# Altium PCB USB U-Turn.PcbDoc
Units mil, origin at the board's own origin, x right, y up, seen from the top; angles counter-clockwise.
Board outline 590.55 x 472.44 mil, 2 copper layers (Component Side, Solder Side); 2 components, 15 nets, 62 pads, 30 vias.
Unrouted connection lines stored in the file: 5.
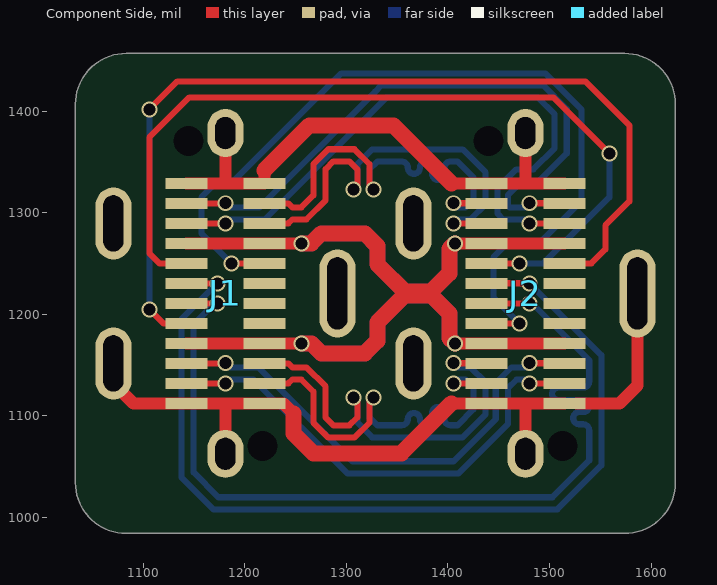
[diagram p0: Component Side view]
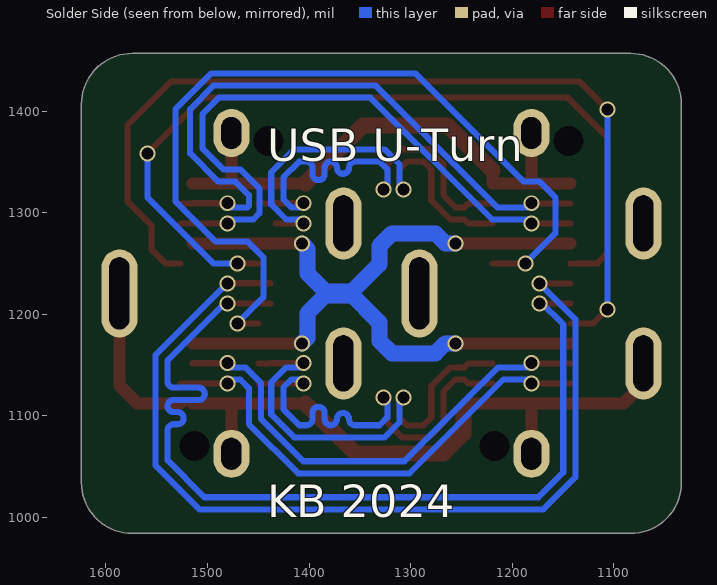
[diagram p1: Solder Side view, seen from below]

## Layer stack, top to bottom
Top Solder: solder mask 0.4, Solder Resist, Dk 3.5
Component Side: signal copper 1.4
Dielectric 1: core 12.6, FR-4, Dk 4.8
Solder Side: signal copper 1.4
Bottom Solder: solder mask 0.4, Solder Resist, Dk 3.5

## Board outline
1033.46,1034.25 1033.46,1406.69 cw(c1083.46,1406.69) 1083.46,1456.69 1574.02,1456.69 cw(c1574.02,1406.69) 1624.02,1406.69 1624.02,1034.25 cw(c1574.02,1034.25) 1574.02,984.25 1083.46,984.25 cw(c1083.46,1034.25)

## Design rules (kind name [scope] priority, off if disabled: settings)
BoardOutlineClearance [All] p1: gap=7.87 ignorepadtopadclearanceinfootprint=FALSE
Clearance [All] p1: gap=5 ignorepadtopadclearanceinfootprint=FALSE except(9.84: Arc-Hole Track-Hole SMDPad-Hole THPad-Hole Via-Hole Fill-Hole Poly-Hole Region-Hole Text-Hole)
ComponentClearance [All] p1: gap=5 collisioncheckmode=3 verticalgap=5 showdistances=TRUE
DiffPairsRouting [All] p1: maxlimit=10 minlimit=5 mostfreqgap=5 toplayer_minwidth=5 toplayer_maxwidth=1000 toplayer_prefwidth=5 bottomlayer_minwidth=5 bottomlayer_maxwidth=1000 bottomlayer_prefwidth=5 maxuncoupledlength=500
Height [All] p1: minheight=0 maxheight=71497.94 prefheight=500
HoleSize [All] p1: absolutevalues=TRUE maxlimit=248.03 minlimit=11.81 maxpercent=80.000 minpercent=20.000
HoleToHoleClearance [All] p1: gap=9.84 allowstackedmicrovias=FALSE
MinimumAnnularRing [All] p1: minimumring=3
MinimumSolderMaskSliver [All] p1: minsoldermaskwidth=0
PlaneClearance [All] p1: clearance=5
PlaneConnect PlaneConnectPowerPads [InPadClass('PowerPads')] p1: planeconnectstyle=Direct reliefexpansion=20 reliefentries=4 reliefconductorwidth=10 reliefairgap=10
PlaneConnect [All] p2: pad.planeconnectstyle=Relief pad.reliefexpansion=11.81 pad.reliefentries=4 pad.reliefconductorwidth=5 pad.reliefairgap=5 via.planeconnectstyle=Direct via.reliefexpansion=11.81 via.reliefentries=4 via.reliefconductorwidth=5 via.reliefairgap=5
PolygonConnect PolygonConnectPowerPads [All vs (InPadClass('PowerPads'))] p1: connectstyle=Direct reliefconductorwidth=10 reliefentries=4 polygonreliefangle="90 Angle" airgapwidth=10
PolygonConnect [All] p2: thpad.connectstyle=Relief thpad.reliefconductorwidth=5 thpad.reliefentries=4 thpad.polygonreliefangle="90 Angle" thpad.airgapwidth=5 smdpad.connectstyle=Relief smdpad.reliefconductorwidth=5 smdpad.reliefentries=4 smdpad.polygonreliefangle="90 Angle" smdpad.airgapwidth=5 via.connectstyle=Direct via.reliefconductorwidth=5 via.reliefentries=4 via.polygonreliefangle="90 Angle" via.airgapwidth=5
RoutingVias [All] p1: holewidth=11.81 width=23.62 viastyle="Through Hole" minholewidth=11.81 minwidth=15.75 maxholewidth=23.62 maxwidth=259.84
SilkToSilkClearance [All] p1: silktosilkclearance=0
SilkToSolderMaskClearance [IsPad] p1: minsilkscreentomaskgap=5 clearancetoexposedcopper=TRUE
SolderMaskExpansion [All] p1: expansion=2.95 istentingtop=FALSE
Width [All] p1: maxlimit=1000 minlimit=5 preferedwidth=5 minimp=50.000000 maximp=50.000000 favimp=50.000000
20 further rules are at their usual default settings.

## Classes and differential pairs
net class USBSS: D_N D_P RX1_N RX1_P RX2_N RX2_P TX1_N TX1_P TX2_N TX2_P
differential pair D: +D_P -D_N
differential pair TX2: +TX2_P -TX2_N
differential pair TX1: +TX1_P -TX1_N
differential pair RX2: +RX2_P -RX2_N
differential pair RX1: +RX1_P -RX1_N

## Components (designator, comment, footprint, x,y, rotation, side; value= is the part's Value field where it differs from the comment)
J1 "USB4151-GF-C" USB4151-GF-C 1181.1,1220.47 r90 top
J2 "USB4151-GF-C" USB4151-GF-C 1476.38,1220.47 r90 top

## Footprints (in the part's own frame and the unit in brackets; to place one, negate y for a bottom-side part, rotate by r counter-clockwise, add the part's x,y. Pads: shape width x height; smd on the part's side, far side on the other; paste and mask are expansions set on the pad)
USB4151-GF-C [mm] "USB TYPE C, PLUG, SMT , G/F, VER"
  rect 0.28x1.05 smd: A1(2.75,0.975) A2(2.25,0.975) A3(1.75,0.975) A4(1.25,0.975) A5(0.75,0.975) A6(0.25,0.975) A7(-0.25,0.975) A8(-0.75,0.975) A9(-1.25,0.975) A10(-1.75,0.975) A11(-2.25,0.975) A12(-2.75,0.975) B1(-2.75,-0.975) B2(-2.25,-0.975) B3(-1.75,-0.975) B4(-1.25,-0.975) B5(-0.75,-0.975) B6(-0.25,-0.975) B7(0.25,-0.975) B8(0.75,-0.975) B9(1.25,-0.975) B10(1.75,-0.975) B11(2.25,-0.975) B12(2.75,-0.975)
  round 0 hole 0.75 unplated: B13(-3.81,-0.925) B13(3.81,0.925)
  oval 1.2x0.9 hole 0.8 slot 0.5 at 90 deg: SHD(-4.01,0) SHD(4.01,0)
  oval 1.8x0.9 hole 1.4 slot 0.5 at 90 deg: SHD(-1.75,2.8) SHD(1.75,2.8)
  oval 2.2x0.9 hole 1.8 slot 0.5 at 90 deg: SHD(0,-2.8)
  body extent -4.33,-2.87 4.33,2.88, height 11.15

## Part data
J1 J2: "USB TYPE C, PLUG, SMT , G/F, VER"

## Via types
v1: diameter 15.75, hole 11.81, Component Side to Solder Side, 30 vias

## Nets (pads, with @x,y where several pads share a name; then routed paths per layer and width w, separated by ;. In a path a pad name is that pad's centre, name@x,y a point inside that pad or via, vN(x,y) a via of type N, cw(c..) or ccw(c..) an arc to the next point about the centre after c; other vN are vias at no path point)
D_N: J1.A7 J2.A7 | length 931.1
  Component Side w6: J1.A7 1173.07,1210.63 v1(1173.23,1210.47) ; J2.A7 1438.15,1210.47 v1(1480.32,1210.47)
  Solder Side w6: v1(1173.23,1210.47) 1171.71,1211.99 1149.8,1190.07 1149.8,1044.34 1174.26,1019.87 1502.9,1019.87 1539.18,1056.15 1539.18,1085.67 ccw(c1533.18,1085.67) 1533.18,1091.67 1529.36,1091.67 cw(c1529.36,1097.67) 1523.36,1097.67 cw(c1529.36,1097.67) 1529.36,1103.67 1533.18,1103.67 ccw(c1533.18,1109.67) 1539.18,1109.67 ccw(c1533.18,1109.67) 1533.18,1115.67 1508.59,1115.67 cw(c1508.59,1121.67) 1502.59,1121.67 cw(c1508.59,1121.67) 1508.59,1127.67 1533.18,1127.67 ccw(c1533.18,1133.67) 1539.18,1133.67 1539.18,1139.67 1539.18,1145.67 1539.18,1154.64 1483.34,1210.47 v1(1480.32,1210.47)
D_P: J1.A6 J2.A6 | length 931.8
  Component Side w6: J1.A6 1173.07,1230.31 v1(1173.23,1230.47) ; J2.A6 1438.15,1230.47 v1(1480.32,1230.47)
  Solder Side w6: v1(1173.23,1230.47) 1137.8,1195.04 1137.8,1039.37 1169.29,1007.87 1507.87,1007.87 1551.18,1051.18 1551.18,1159.61 v1(1480.32,1230.47)
GND: J1.A1 J1.A12 J1.B1 J1.B12 J1.SHD J2.A1 J2.A12 J2.B1 J2.B12 J2.SHD | length 1328.8
  Component Side w6: J2.SHD@1476.38,1074.41 J2.SHD@1488.19,1062.6 ; J2.SHD@1476.38,1366.54 J2.SHD@1488.19,1378.35 ; J2.B1 J2.B1@1526.57,1112.2
  Component Side w12: J1.SHD@1070.87,1151.57 1070.87,1131.89 1090.55,1112.2 J1.A12 1181.1,1112.2 ; J1.A1 1181.1,1328.74 ; J1.SHD@1181.1,1062.6 1181.1,1112.2 ; J1.SHD@1181.1,1378.35 1181.1,1328.74 ; 1219.49,1341.54 J1.B12 1181.1,1328.74 ; 1248.03,1102.36 1238.19,1112.2 J1.B1 1181.1,1112.2 ; 1403.54,1112.2 J2.A12 1476.38,1112.2 ; 1403.54,1328.74 J2.A1 1476.38,1328.74 ; J2.SHD@1476.38,1074.41 1476.38,1112.2 ; J2.SHD@1476.38,1366.54 1476.38,1328.74 ; J2.B1 1476.38,1112.2 ; J2.B12 1476.38,1328.74 ; J2.B1@1526.57,1112.2 1568.9,1112.2 1586.61,1129.92 J2.SHD@1586.61,1220.47
  Component Side w16: 1219.49,1341.54 1263.78,1385.83 1346.46,1385.83 1403.54,1328.74 ; 1248.03,1102.36 1248.03,1082.68 1267.72,1062.99 1354.33,1062.99 1403.54,1112.2
NetJ1_A5: J1.A5 J2.A5 | length 818.2
  Component Side w6: J1.A5 1116.14,1250 1106.3,1259.84 1106.3,1374.02 1145.67,1413.39 1503.94,1413.39 v1(1559.06,1358.27) ; J2.A5@1449.8,1250 v1(1470.47,1250)
  Solder Side w6: 1478.35,1250 1494.09,1250 1559.06,1314.96 v1(1559.06,1358.27)
NetJ1_A8: J1.A8 J2.B8 | length 906.9
  Component Side w6: v1(1106.3,1204.72) 1120.08,1190.94 J1.A8 ; v1(1106.3,1401.57) 1133.86,1429.13 1535.43,1429.13 1578.74,1385.83 1578.74,1311.02 1555.12,1287.4 1555.12,1263.78 1541.34,1250 J2.B8@1526.57,1250
  Solder Side w6: v1(1106.3,1204.72) v1(1106.3,1401.57)
NetJ1_B8: J1.B8 J2.A8 | length 845.1
  Component Side w6: v1(1187.01,1250) J1.B8 ; J2.A8@1449.8,1190.94 v1(1470.47,1190.94)
  Solder Side w6: v1(1187.01,1250) 1157.48,1279.53 1157.48,1314.96 1173.23,1330.71 1188.98,1330.71 1295.28,1437.01 1496.06,1437.01 1531.5,1401.57 1531.5,1311.02 1492.13,1271.65 1460.63,1271.65 1444.88,1255.91 1444.88,1216.54 v1(1470.47,1190.94)
RX1_N: J1.B10 J2.A3 | length 425.9
  Component Side w6: J1.B10 1243.16,1289.37 1247,1293.21 1260.88,1293.21 1279.72,1312.05 1279.72,1342.71 1287.4,1350.39 1303.15,1350.39 1310.93,1342.61 1310.93,1326.68 v1(1307.09,1322.83) ; v1(1405.51,1289.21) 1432.91,1289.21 J2.A3@1433.07,1289.37
  Solder Side w6: v1(1307.09,1322.83) 1310.93,1326.68 1310.93,1347.49 1325.64,1362.2 1414.61,1362.2 1437.2,1339.62 1437.2,1308.12 1422.29,1293.21 1409.51,1293.21 v1(1405.51,1289.21)
RX1_P: J1.B11 J2.A2 | length 442.4
  Component Side w6: J1.B11 1243.16,1309.06 1247,1305.21 1255.91,1305.21 1267.72,1317.02 1267.72,1347.68 1278.92,1358.88 1282.43,1362.39 1308.12,1362.39 1322.93,1347.58 1322.93,1326.74 v1(1326.77,1322.9) ; v1(1405.51,1309.21) 1437.83,1309.21 J2.A2 J2.A2@1449.8,1309.06
  Solder Side w6: v1(1326.77,1322.9) 1322.93,1326.74 1322.93,1342.52 1330.61,1350.2 1336.61,1350.2 1348.61,1350.2 1354.61,1350.2 cw(c1354.61,1344.2) 1360.61,1344.2 ccw(c1366.61,1344.2) 1366.61,1338.2 ccw(c1366.61,1344.2) 1372.61,1344.2 cw(c1378.61,1344.2) 1378.61,1350.2 cw(c1378.61,1344.2) 1384.61,1344.2 1384.61,1338.08 ccw(c1390.61,1338.08) 1390.61,1332.08 ccw(c1390.61,1338.08) 1396.61,1338.08 1396.61,1344.2 cw(c1402.61,1344.2) 1402.61,1350.2 1409.45,1350.2 1409.64,1350.2 1425.2,1334.65 1425.2,1313.09 1417.32,1305.21 1409.51,1305.21 v1(1405.51,1309.21)
RX2_N: J1.A10 J2.B3 | length 472.8
  Component Side w6: J1.A10 1180.94,1151.57 v1(1181.1,1151.73) ; v1(1480.32,1151.73) 1514.61,1151.73 J2.B3
  Solder Side w6: v1(1181.1,1151.73) 1185.1,1147.73 1213.63,1147.73 1306.06,1055.31 1405.7,1055.31 1447.2,1096.8 1447.2,1132.24 1462.69,1147.73 1476.32,1147.73 v1(1480.32,1151.73)
RX2_P: J1.A11 J2.B2 | length 484.6
  Component Side w6: J1.A11 1180.94,1131.89 v1(1181.1,1131.73) ; v1(1480.32,1131.73) 1514.61,1131.73 J2.B2 J2.B2@1526.57,1131.89
  Solder Side w6: v1(1181.1,1131.73) 1185.1,1135.73 1208.66,1135.73 1301.09,1043.31 1410.67,1043.31 1459.2,1091.83 1459.2,1127.27 1467.66,1135.73 1476.32,1135.73 v1(1480.32,1131.73)
TX1_N: J1.A3 J2.B10 | length 633.3
  Component Side w6: J1.A3 1180.94,1289.37 v1(1181.1,1289.21) ; v1(1480.32,1289.21) 1514.61,1289.21 J2.B10 J2.B10@1526.57,1289.37
  Solder Side w6: v1(1181.1,1289.21) 1185.1,1293.21 1219.63,1293.21 1339.62,1413.2 1488.76,1413.2 1505.03,1396.93 1505.03,1363.3 1484.25,1342.52 1467.47,1342.52 1448.82,1323.87 1448.82,1299.21 1454.82,1293.21 1476.32,1293.21 v1(1480.32,1289.21)
TX1_P: J1.A2 J2.B11 | length 634.1
  Component Side w6: J1.A2 1180.94,1309.06 v1(1181.1,1309.21) ; v1(1480.32,1309.21) 1514.61,1309.21 J2.B11 J2.B11@1526.57,1309.06
  Solder Side w6: v1(1181.1,1309.21) 1185.1,1305.21 1214.66,1305.21 1328.58,1419.13 1334.65,1425.2 1493.73,1425.2 1517.03,1401.9 1517.03,1358.33 1489.22,1330.52 1472.44,1330.52 1459.2,1317.28 1459.2,1306.65 1460.63,1305.21 1476.32,1305.21 v1(1480.32,1309.21)
TX2_N: J1.B3 J2.A10 | length 442.6
  Component Side w6: J1.B3 1243.16,1151.57 1247,1147.73 1260.88,1147.73 1279.72,1128.89 1279.72,1098.24 1287.4,1090.55 1303.15,1090.55 1310.93,1098.33 1310.93,1114.27 v1(1307.09,1118.11) ; v1(1405.51,1151.73) 1437.83,1151.73 J2.A10 J2.A10@1449.8,1151.57
  Solder Side w6: v1(1307.09,1118.11) 1310.93,1114.27 1310.93,1093.45 1325.64,1078.74 1414.61,1078.74 1437.2,1101.33 1437.2,1132.83 1422.29,1147.73 1409.51,1147.73 v1(1405.51,1151.73)
TX2_P: J1.B2 J2.A11 | length 442.4
  Component Side w6: J1.B2 1243.16,1131.89 1247,1135.73 1255.91,1135.73 1267.72,1123.92 1267.72,1093.27 1278.92,1082.07 1282.43,1078.55 1308.12,1078.55 1322.93,1093.36 1322.93,1114.2 v1(1326.77,1118.05) ; v1(1405.51,1131.73) 1437.83,1131.73 J2.A11 J2.A11@1449.8,1131.89
  Solder Side w6: v1(1326.77,1118.05) 1322.93,1114.2 1322.93,1098.42 1330.61,1090.74 1336.61,1090.74 1348.61,1090.74 1354.61,1090.74 ccw(c1354.61,1096.74) 1360.61,1096.74 cw(c1366.61,1096.74) 1366.61,1102.74 cw(c1366.61,1096.74) 1372.61,1096.74 ccw(c1378.61,1096.74) 1378.61,1090.74 ccw(c1378.61,1096.74) 1384.61,1096.74 1384.61,1102.87 cw(c1390.61,1102.87) 1390.61,1108.87 cw(c1390.61,1102.87) 1396.61,1102.87 1396.61,1096.74 ccw(c1402.61,1096.74) 1402.61,1090.74 1409.45,1090.74 1409.64,1090.74 1425.2,1106.3 1425.2,1127.86 1417.32,1135.73 1409.51,1135.73 v1(1405.51,1131.73)
VBUS: J1.A4 J1.A9 J1.B4 J1.B9 J2.A4 J2.A9 J2.B4 J2.B9 | length 1295.7
  Component Side w12: J1.A9 J1.B4 v1(1255.91,1171.26) ; J1.A4 J1.B9 v1(1255.91,1269.68) ; v1(1406.96,1171.26) J2.A9 J2.B4 ; v1(1406.96,1269.68) J2.A4 J2.B9
  Component Side w16: v1(1255.91,1171.26) 1265.75,1171.26 1275.59,1161.42 1318.38,1161.42 1330.71,1173.75 1330.71,1191.82 1359.36,1220.47 1330.71,1249.13 1330.71,1267.2 1318.38,1279.53 1275.59,1279.53 1265.75,1269.68 v1(1255.91,1269.68) ; v1(1406.96,1171.26) 1401.57,1176.64 1401.57,1200.79 1381.89,1220.47 1401.57,1240.16 1401.57,1264.3 v1(1406.96,1269.68)
  Component Side w20: 1359.36,1220.47 1381.89,1220.47
  Solder Side w16: v1(1255.91,1171.26) 1265.75,1171.26 1275.59,1161.42 1318.38,1161.42 1330.71,1173.75 1330.71,1191.82 1359.36,1220.47 1330.71,1249.13 1330.71,1267.2 1318.38,1279.53 1275.59,1279.53 1265.75,1269.68 v1(1255.91,1269.68) ; v1(1406.96,1171.26) 1401.57,1176.64 1401.57,1200.79 1381.89,1220.47 1401.57,1240.16 1401.57,1264.3 v1(1406.96,1269.68)
  Solder Side w20: 1359.36,1220.47 1381.89,1220.47
pads on no net: J1.B5 J1.B6 J1.B7 J1.B13 J2.B5 J2.B6 J2.B7 J2.B13

## Silkscreen, mask and mechanical layers (free items; w line width, h text height)
Bottom Overlay:
  text "USB U-Turn" at 1440.94,1350.39 h32
  text "KB 2024" at 1440.94,1000 h32
Board Outline:
  the board outline again, w3.94